# EAGLE board relay_dip_v011 (EAGLE 6.5.0)
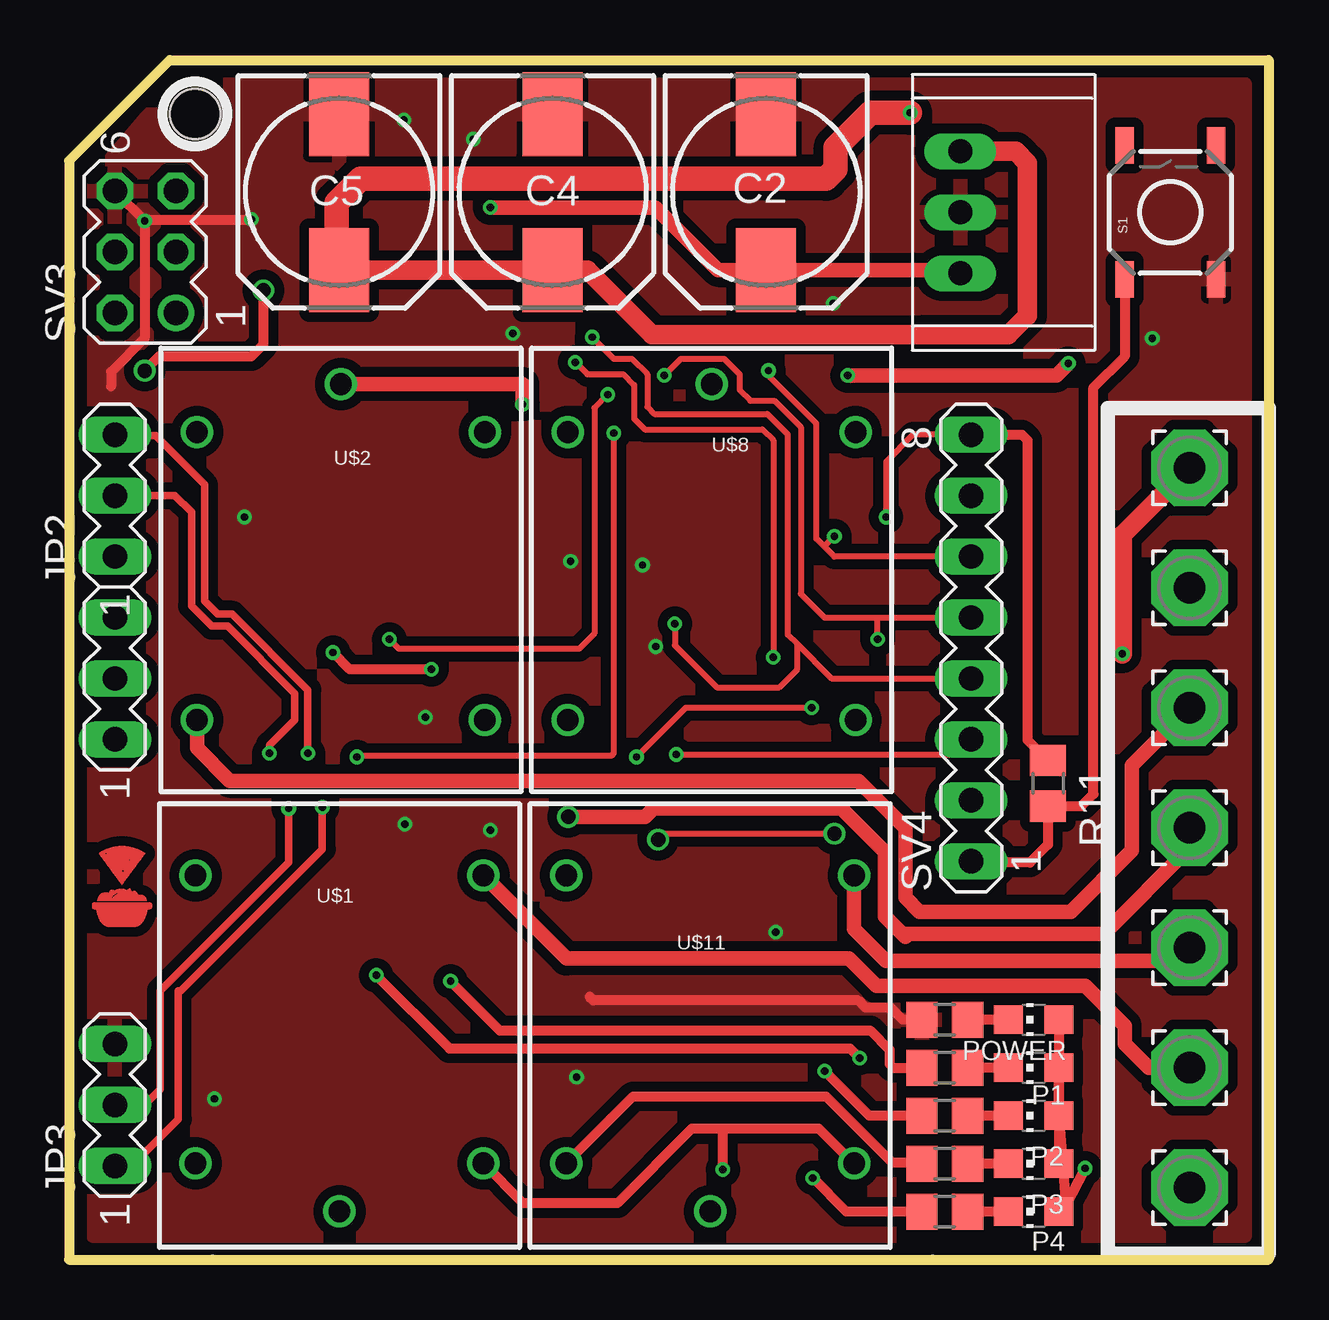
[diagram p0: board, top side]
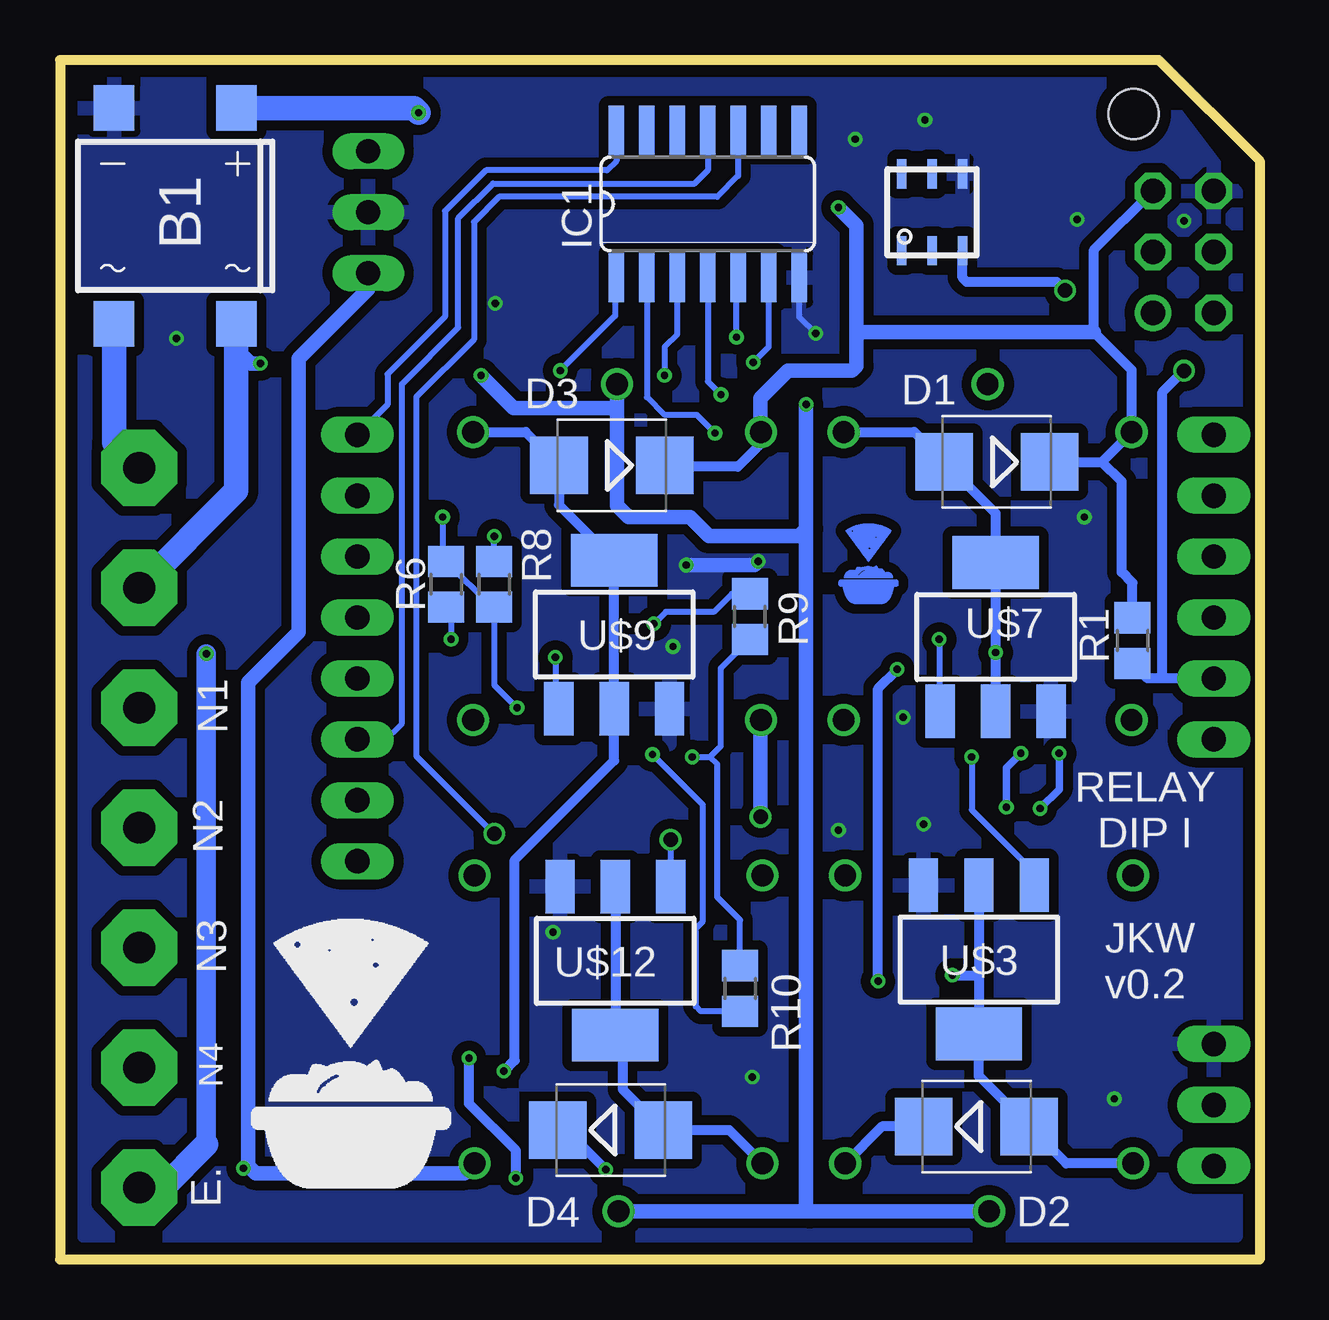
[diagram p1: board, bottom side, seen from below]

Size 50 x 50 mm. Coordinates in mm from the lower left corner, seen from the top.
Outline: 4.2,50 50,50 50,0 0,0 0,45.8 4.2,50
Copper layers (1*16): Top 0.035mm / dielectric 1.6mm / Bottom 0.035mm
Design rules "Elecrow_2-layer_PCB_eagle_rule": minimum track width 6mil, minimum drill 12mil, track to track 6mil, track to pad 6mil, pad to pad 6mil, via to via 8mil, smd to smd 0mil, copper to edge 20mil, drill to drill 10mil, minimum pad ring 6mil, minimum via ring 6mil, stop-mask expansion 0mil, vias tented up to drill 100mil, thermal gap 10mil
Holes 2.1 mm at 5.25,47.75

## Footprints (pad centres in the part's own frame; a part is rotated, then mirrored left to right if it is on the bottom)
DBS = smd 1.7 x 1.9: + -2.55,-4.5; - 2.55,-4.5; AC1 -2.55,4.5; AC2 2.55,4.5
150CLZ-0810 = smd 3.5 x 2.5: + 3.25,0; - -3.25,0
SMB = smd 2.4 x 2.4: A 2.2,0; C -2.2,0
3,17/1,3 = drill 1.321 pad 3.175 octagon: 1 0,0
SO14 = smd 0.66 x 2.032: 1 -3.81,-3.073; 2 -2.54,-3.073; 3 -1.27,-3.073; 4 0,-3.073; 5 1.27,-3.073; 6 2.54,-3.073; 7 3.81,-3.073; 8 3.81,3.073; 9 2.54,3.073; 10 1.27,3.073; 11 0,3.073; 12 -1.27,3.073; 13 -2.54,3.073; 14 -3.81,3.073
TSOC6 = smd 0.406 x 1.219: 1 -1.27,-1.6; 2 0,-1.6; 3 1.27,-1.6; 4 1.27,1.6; 5 0,1.6; 6 -1.27,1.6
MA03-1 = drill 1.016 long: 1 -2.54,0; 2 0,0; 3 2.54,0
CHIP-LED0805 = smd 1.2 x 1.2: A 0,-1.05; C 0,1.05
R0805 = smd 1.3 x 1.5: 1 -0.95,0; 2 0.95,0
TACTILE-SWITCH-SMD = smd 1.524 x 0.762: 1 -2.794,1.905; 2 2.794,1.905; 3 -2.794,-1.905; 4 2.794,-1.905
MA03-2 = drill 1.016: 1 -2.54,-1.27 | drill 1.016 octagon: 2 -2.54,1.27; 3 0,-1.27; 4 0,1.27; 5 2.54,-1.27; 6 2.54,1.27
MA08-1 = drill 1.016 long: 1 -8.89,0; 2 -6.35,0; 3 -3.81,0; 4 -1.27,0; 5 1.27,0; 6 3.81,0; 7 6.35,0; 8 8.89,0
SRD-05VDC-SL-C = drill 0.9: COIL0 -5.39,-6.12; COIL1 -5.39,5.88; SWCLOSED 6.61,-6.12; SWCOMMON -7.39,-0.12; SWOPEN 6.61,5.88
SOT223 = smd 1.219 x 2.235: 1 -2.311,-3.099; 2 0,-3.099; 3 2.311,-3.099 | smd 3.6 x 2.2: 4 0,3.099
SIP3 = drill 1 long: GND 5.75,2; IN 3.21,2; OUT 8.29,2

## Placement (x,y rotation side)
B1  DBLS202G  [DBS]  45.2,43.5 180 bottom
C2  EMZR500ADA221MHA0G  [150CLZ-0810]  29.05,44.5 270 top
C4  EMZR500ADA221MHA0G  [150CLZ-0810]  20.15,44.5 270 top
C5  EMZR500ADA221MHA0G  [150CLZ-0810]  11.25,44.5 270 top
D1  [SMB]  10.95,33.25 180 bottom
D2  [SMB]  11.8,5.55 0 bottom
D3  [SMB]  27,33.1 180 bottom
D4  [SMB]  27.05,5.4 0 bottom
E  WIREPAD3,17/1,3  [3,17/1,3]  46.7,33 90 top
E.  WIREPAD3,17/1,3  [3,17/1,3]  46.7,3 90 top
IC1  74HCT04D  [SO14]  23,44 0 bottom
IC2  DS2432P  [TSOC6]  13.65,43.65 0 bottom
JP1  [MA03-1]  1.91,24.22 90 top
JP2  [MA03-1]  1.91,31.84 90 top
JP3  [MA03-1]  1.91,6.44 90 top
N1  WIREPAD3,17/1,3  [3,17/1,3]  46.7,23 0 top
N2  WIREPAD3,17/1,3  [3,17/1,3]  46.7,18 0 top
N3  WIREPAD3,17/1,3  [3,17/1,3]  46.7,13 0 top
N4  WIREPAD3,17/1,3  [3,17/1,3]  46.7,8 90 top
P  WIREPAD3,17/1,3  [3,17/1,3]  46.7,28 90 top
P1  [CHIP-LED0805]  40.2,8 90 top
P2  [CHIP-LED0805]  40.2,6 90 top
P3  [CHIP-LED0805]  40.2,4 90 top
P4  [CHIP-LED0805]  40.2,2 90 top
POWER  [CHIP-LED0805]  40.2,10 90 top
R1  [R0805]  5.3,25.8 90 bottom
R2  330R  [R0805]  36.5,2 180 top
R3  330R  [R0805]  36.5,8 180 top
R4  330R  [R0805]  36.5,6 180 top
R5  330R  [R0805]  36.5,4 180 top
R6  10k  [R0805]  33.9,28.15 270 bottom
R7  330R  [R0805]  36.5,10 180 top
R8  10k  [R0805]  31.9,28.15 90 bottom
R9  10k  [R0805]  21.25,26.8 90 bottom
R10  10k  [R0805]  21.65,11.3 270 bottom
R11  10k  [R0805]  40.8,19.85 270 top
S1  SWITCH-MOMENTARY-2SMD  [TACTILE-SWITCH-SMD]  45.9,43.65 90 top
SV3  [MA03-2]  3.17,42 90 top
SV4  [MA08-1]  37.6,25.49 90 top
U$1  RELAYPTH  [SRD-05VDC-SL-C]  11.15,9.4 90 top
U$2  RELAYPTH  [SRD-05VDC-SL-C]  11.45,29.1 270 top
U$3  NMOSFET_SMD_223  [SOT223]  11.7,12.5 180 bottom
U$4  LOGO_3X3_COPPER  [LOGO_3X3_COPPER]  2.2,15.55 0 top
U$5  LOGO_10X10_SILK  [LOGO_10X10_SILK]  42.05,2.95 0 bottom
U$6  LOGO_3X3_COPPER  [LOGO_3X3_COPPER]  16.3,29 0 bottom
U$7  NMOSFET_SMD_223  [SOT223]  11,25.95 0 bottom
U$8  RELAYPTH  [SRD-05VDC-SL-C]  26.9,29.1 270 top
U$9  NMOSFET_SMD_223  [SOT223]  26.9,26.05 0 bottom
U$10  R-7805-1.0  [SIP3]  35.15,49.4 270 top
U$11  RELAYPTH  [SRD-05VDC-SL-C]  26.6,9.4 90 top
U$12  NMOSFET_SMD_223  [SOT223]  26.85,12.45 180 bottom

## Library data of the parts
B1 = rectifier
C2 C4 C5 R1-R11 = rcl
D1-D4 = diode
E E. N1-N4 P = wirepad
IC1 = 74xx-eu
IC2 = 1wire
JP1-JP3 SV3 SV4 = con-lstb; OC_FARNELL: unknown; OC_NEWARK: unknown
P1-P4 POWER = led
S1 = SparkFun-Electromechanical; PROD_ID: SWCH-08247
U$1 U$2 U$8 U$11 = SRD-05VDC-SL-C
U$3 U$7 U$9 U$12 = transistor-power
U$4-U$6 = logo
U$10 = Kolja

## Nets
3V: IC1.14 R6.1 R8.1 R9.1 R10.1 R11.1 SV4.8
EARTH: B1.AC2 E.1 E..1
GND: B1.- C2.- C4.- C5.- IC1.7 IC2.4 JP3.3 R7.2 S1.3 SV3.6 U$3.3 U$7.3 U$9.3 U$10.GND U$12.3
LD2: IC2.3 JP1.2 R1.1
N$1: R11.2 S1.1 SV4.1
N$2: IC1.2 U$3.1
N$3: P4.C R2.1
N$4: P1.C R3.1
N$5: B1.+ C4.+ C5.+ U$10.IN
N$7: IC1.4 U$7.1
N$8: P2.C R4.1
N$9: IC1.6 U$9.1
N$10: P3.C R5.1
N$11: IC1.10 U$12.1
N$29: POWER.C R7.1
NCL: N4.1 U$1.SWCLOSED
NCL1: N1.1 U$2.SWCLOSED
NCL2: N2.1 U$8.SWCLOSED
NCL3: N3.1 U$11.SWCLOSED
P0: IC1.1 R8.2 SV4.6
P2: IC1.3 R6.2 SV4.5
P4: IC1.5 R9.2 SV4.4
P6: IC1.11 R10.2 SV4.3
PHASE: B1.AC1 P.1 U$1.SWCOMMON U$2.SWCOMMON U$8.SWCOMMON U$11.SWCOMMON
RELAY_LO0: D2.A R2.2 U$1.COIL1 U$3.2 U$3.4
RELAY_LO1: D1.A R3.2 U$2.COIL1 U$7.2 U$7.4
RELAY_LO2: D3.A R4.2 U$8.COIL1 U$9.2 U$9.4
RELAY_LO3: D4.A R5.2 U$11.COIL1 U$12.2 U$12.4
SCL: JP2.2 JP3.2
SDA: JP2.3 JP3.1
VCC: C2.+ D1.C D2.C D3.C D4.C P1.A P2.A P3.A P4.A POWER.A R1.2 SV3.5 U$1.COIL0 U$2.COIL0 U$8.COIL0 U$10.OUT U$11.COIL0

## Tracks (layer width: path | path; a pad name or v marks a point on that pad's centre or on a via)
3V  (via drill 0.3)
  Top 0.254: SV4.8 35.18,34.38 34.05,33.25 v34.05,30.95 | v30.95,23 25.7,23 v23.65,20.95
  Top 0.406: SV4.8 39.72,34.38 39.95,34.15 39.95,21.65 R11.1
  Bottom 0.254: IC1.14 26.81,45.79 27.2,45.4 32.25,45.4 33.95,43.7 33.95,39.3 36.35,36.9 36.35,35.63 SV4.8 37.5,34.48 | v34.05,30.95 34.05,29.25 R6.1 32,27.2 R8.1 31.9,23.95 v30.95,23 | v23.65,20.95 22.9,20.95 | 22.9,20.95 22.45,21.4 22.45,24.65 R9.1 | R10.1 21.65,14.15 22.6,15.1 22.6,20.65 22.9,20.95
EARTH  (via drill 0.3)
  Top 0.813: v43.9,25.25 43.9,30.2 E.1
  Bottom 0.813: v43.9,25.25 43.9,4.8
  Bottom 1.016: E..1 45.7,3 43.9,4.8 | B1.AC2 47.75,34.05 E.1
GND  (via drill 0.3)
  Top 0.406: v3.15,43.3 3.19,43.25 3.29,43.35 v7.6,43.35 | SV3.6 v3.15,43.3 | v3.15,43.3 3.15,38.4 1.75,37 1.75,36.4 | 21.7,10.95 21.85,10.8 32.9,10.8 33.2,10.5 34.25,10.5 34.75,10 R7.2
  Bottom 0.254: IC1.7 19.19,39.29 v18.5,38.6
  Bottom 0.61: v20.9,29.1 21.05,28.95 v23.9,28.95
  other vias: 14,18.15 6.05,6.7 21.15,7.6 17.55,17.9 13.95,47.5 16.85,46.7 7.3,30.95 24.45,25.55 14.85,22.6 29.45,13.65 31.85,39.85 45.15,38.4
  pour Top (isolate 0.406): 1,1 1,45 4.4,49 49,49 49,1
  pour Bottom (isolate 0.406): 1,1 49,1 49,49 4.4,49 1,44.5
LD2  (via drill 0.6)
  Top 0.406: v3.15,37.05 3.75,37.65 7.6,37.65 8.1,38.15 v8.1,40.4
  Bottom 0.406: JP1.2 4.2,24.22 | 4.2,24.22 4.67,24.22 R1.1 | 4.2,24.22 4.05,24.37 4.05,36.15 v3.15,37.05 | v8.1,40.4 8.45,40.75 12.2,40.75 12.38,40.93 IC2.3
N$1
  Top 0.406: SV4.1 37.65,16.55 40.05,16.55 40.8,17.3 R11.2 42.2,18.9 42.7,19.4 42.7,36.35 43.99,37.65 S1.1
N$2  (via drill 0.3)
  Top 0.254: v22.7,34.45 22.7,21.1 22.6,21 12.05,21 v12,20.95
  Bottom 0.254: IC1.2 25.54,35.94 24.8,35.2 23.45,35.2 v22.7,34.45 | v12,20.95 12,18.75 9.39,16.14 U$3.1
N$3
  Top 0.406: P4.C R2.1
N$4
  Top 0.406: P1.C R3.1
N$5  (via drill 0.3)
  Top 0.813: C5.+ C4.+ 21.6,41.25 24.3,38.55 35,38.55 35.5,38.55 39.15,38.55 39.95,39.35 39.95,45.7 39.46,46.19 U$10.IN
  Top 1.016: v35.05,47.8 33.4,47.8 31.95,46.35 31.95,45.45 31.55,45.05 12.15,45.05 11.15,44.05 11.15,41.35 C5.+
  Bottom 1.016: B1.+ 35.25,48 v35.05,47.8
N$7  (via drill 0.3)
  Top 0.254: v22.45,36.05 21.9,35.5 21.9,26.1 21.25,25.45 13.75,25.45 v13.35,25.85
  Bottom 0.254: IC1.4 23,36.6 v22.45,36.05 | v13.35,25.85 13.35,22.89 U$7.1
N$8
  Top 0.406: P2.C R4.1
N$9  (via drill 0.3)
  Top 0.254: v21.1,37.4 21.6,36.9 23.1,36.9 23.55,36.45 23.55,35.05 24,34.6 28.9,34.6 29.35,34.15 v29.35,25.1
  Bottom 0.254: IC1.6 20.46,38.04 v21.1,37.4 | v29.35,25.1 29.35,23.09 U$9.1
N$10
  Top 0.406: P3.C R5.1
N$11  (via drill 0.6)
  Top 0.254: v31.9,17.75 24.8,17.75 v24.55,17.5
  Bottom 0.254: v24.55,17.5 U$12.1 | IC1.10 21.73,45.17 22.6,44.3 31.7,44.3 32.75,43.25 32.75,38.35 35.15,35.95 35.15,21 v31.9,17.75
N$29
  Top 0.406: POWER.C R7.1
NCL
  Top 0.61: N4.1 45,8 44,9 44,9.75 42.35,11.4 33.65,11.4 32.5,12.55 20.73,12.55 U$1.SWCLOSED
NCL1
  Top 0.61: U$2.SWCLOSED 5.33,21.32 6.7,19.95 32.9,19.95 34.85,18 34.85,15.1 35.45,14.5 41.75,14.5 44.3,17.05 44.3,20.6 N1.1
NCL2  (via drill 0.6)
  Top 0.61: v20.8,18.45 24,18.45 24.35,18.8 32.2,18.8 34,17 34,14.3 34.73,13.57 | 34.73,13.57 34.85,13.45 | N2.1 46.7,17.15 43.12,13.57 34.73,13.57
  Bottom 0.61: U$8.SWCLOSED 20.8,22.47 v20.8,18.45
NCL3
  Top 0.61: U$11.SWCLOSED 32.72,13.78 34.05,12.45 46.15,12.45 N3.1
P0  (via drill 0.3)
  Top 0.254: SV4.6 31.9,29.3 31.43,29.77 | 31.43,29.77 31.15,30.05 31.15,34.85 29.15,36.85 v29.15,37.05 | v31.9,30.15 31.52,29.77 31.43,29.77
  Bottom 0.254: R8.2 v31.9,30.15 | v29.15,37.05 26.86,39.34 26.86,40.88 IC1.1
P2  (via drill 0.3)
  Top 0.254: 33.7,26.76 31.49,26.76 30.5,27.75 30.5,34.7 29.4,35.8 28.4,35.8 27.95,36.25 27.95,36.9 27.3,37.55 25.5,37.55 v24.8,36.85 | 33.7,26.76 SV4.5 | v33.7,25.85 33.7,26.76
  Bottom 0.254: IC1.3 24.27,38.58 24.8,38.05 v24.8,36.85 | R6.2 33.7,27 v33.7,25.85
P4  (via drill 0.3)
  Top 0.254: 30.35,25.65 29.95,26.05 29.95,34.4 29.1,35.25 24.4,35.25 24.1,35.55 24.1,36.9 23.45,37.55 22.7,37.55 v21.8,38.45 | 30.35,25.65 31.78,24.22 SV4.4 | v25.25,26.5 25.25,25.6 27,23.85 29.6,23.85 30.35,24.6 30.35,25.65
  Bottom 0.254: v21.8,38.45 21.8,40.86 IC1.5 | R9.2 22,27.75 22.75,27 24.75,27 v25.25,26.5
P6  (via drill 0.3)
  Top 0.254: v25.3,21.05 36.97,21.05 SV4.3
  Bottom 0.254: IC1.11 23,45.4 23.55,44.85 31.95,44.85 33.4,43.4 33.4,38.85 35.75,36.5 35.75,22.35 36.55,21.55 37.47,21.55 SV4.3 | R10.2 23.3,10.35 23.5,10.55 23.5,13.8 23.2,14.1 23.2,18.95 v25.3,21.05
PHASE  (via drill 0.3)
  Top 0.61: U$2.SWCOMMON 18.9,36.49 v18.9,35.65 | v32.45,36.85 41.15,36.85 v41.65,37.35
  Bottom 0.61: U$1.SWCOMMON 18.75,2.01 | 18.75,2.01 U$11.SWCOMMON | 18.9,30.45 18.9,2.16 18.75,2.01 | 18.9,30.45 v18.9,35.65 | U$8.SWCOMMON 26.78,35.55 | 26.78,35.55 26.78,31.43 26.3,30.95 23.75,30.95 22.95,30.15 19.2,30.15 18.9,30.45 | v32.45,36.85 31.1,35.5 26.83,35.5 26.78,35.55 | v41.65,37.35 42.05,37.35 42.65,37.95
  Bottom 1.016: B1.AC1 42.65,37.95 42.65,32.05 P.1
RELAY_LO0  (via drill 0.3)
  Top 0.406: R2.2 32.4,2 v31,3.4 | v12.8,11.85 15.85,8.8 32.55,8.8 v32.95,8.4
  Bottom 0.406: U$3.2 11.7,11.85 | 11.7,11.85 U$3.4 11.7,7.65 D2.A 8.06,4.01 U$1.COIL1 | v12.8,11.85 11.7,11.85 | v31,3.4 31,4.55 32.95,6.5 v32.95,8.4
RELAY_LO1  (via drill 0.3)
  Top 0.406: v15.1,24.6 11.7,24.6 v11,25.3 | v15.9,11.6 17.95,9.55 33.4,9.55 34.2,8.75 34.2,8.15 34.35,8 R3.2
  Bottom 0.406: U$2.COIL1 14.39,34.49 D1.A 11,31.1 U$7.4 v11,25.3 U$7.2 10.95,22.8 | v15.9,11.6 15.9,23.8 v15.1,24.6
RELAY_LO2  (via drill 0.3)
  Top 0.406: R4.2 33.35,6 v31.5,7.85
  Bottom 0.406: U$8.COIL1 30.59,34.49 D3.A 29.2,31.45 U$9.4 U$9.2 26.9,20.8 31.05,16.65 31.05,8.3 v31.5,7.85
RELAY_LO3
  Top 0.406: U$11.COIL1 23.51,6.8 31.55,6.8 34.3,4.05 35.5,4.05 R5.2
  Bottom 0.406: U$12.2 U$12.4 | U$12.4 26.85,9.2 26.55,8.9 26.55,7.1 D4.A 22.11,5.4 U$11.COIL1 | 27.2,9 U$12.4
SCL  (via drill 0.3)
  Top 0.305: JP3.2 3.15,6.45 3.8,7.1 3.8,11.2 9.15,16.55 v9.15,18.8 | JP2.2 4.41,31.84 5.1,31.15 5.1,27.25 5.95,26.4 6.6,26.4 9.4,23.6 9.4,22.5 8.35,21.45 v8.35,21.1
  Bottom 0.305: v8.35,21.1 8.35,19.6 v9.15,18.8
SDA  (via drill 0.3)
  Top 0.305: JP3.1 2.6,3.9 4.55,5.85 4.55,11.2 4.65,11.2 10.55,17.1 v10.55,18.85 | v9.95,21.1 9.95,23.75 6.8,26.9 6.2,26.9 5.65,27.45 5.65,32.3 3.6,34.35 1.94,34.35 JP2.3
  Bottom 0.305: v10.55,18.85 10.55,20.5 v9.95,21.1
VCC  (via drill 0.3)
  Top 0.406: 41.55,2.25 P2.A P1.A | 41.55,2.25 v42.35,3.8 | POWER.A P1.A | P1.A P3.A | U$11.COIL0 32.69,4.01 31.25,5.45 27.1,5.45 | 27.1,5.45 25.95,5.45 22.85,2.35 18.93,2.35 U$1.COIL0 | v27.25,3.75 27.25,5.3 27.1,5.45 | P4.A 41.55,2.25
  Top 0.61: v17.55,43.85 24.45,43.85 27.05,41.25 C2.+ 37.01,41.25 U$10.OUT
  Bottom 0.406: D3.C 24.75,33.05 21.75,33.05 20.78,34.02 U$8.COIL0 20.8,34.51 | SV3.5 6.9,42.09 6.9,38.65 5.33,37.08 U$2.COIL0 6.57,33.25 | D1.C 6.57,33.25 | v42.35,3.8 42.25,3.8 42.15,3.9 | D2.C 15.73,5.55 U$1.COIL0 | D4.C 28.9,5.4 v27.25,3.75 | R1.2 5.3,28.2 5.75,28.65 5.75,32.43 6.57,33.25
  Bottom 0.61: 6.9,38.65 16.75,38.65 16.8,38.7 | U$11.COIL0 33.13,3.6 41.85,3.6 42.15,3.9 42.15,24.05 40.05,26.15 40.05,37.55 37.15,40.45 U$10.OUT | v17.55,43.85 16.8,43.1 16.8,38.7 | 20.8,34.51 20.8,35.9 19.65,37.05 17,37.05 16.8,37.25 16.8,38.7

## Text on the board
bPlace: RELAY / DIP I | JKW / v0.2